# EAGLE board SMD_optek_led-mosfet (EAGLE 6.2)
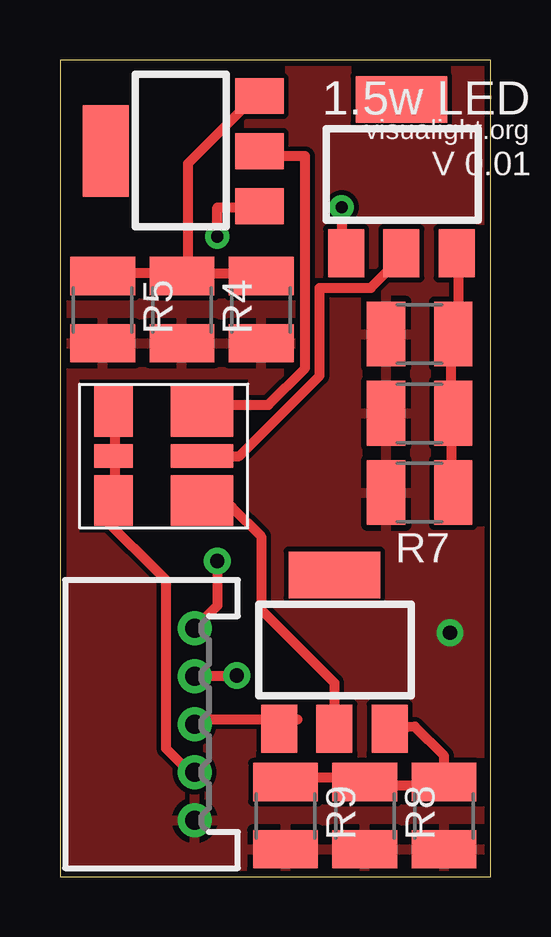
[diagram p0: board, top side]
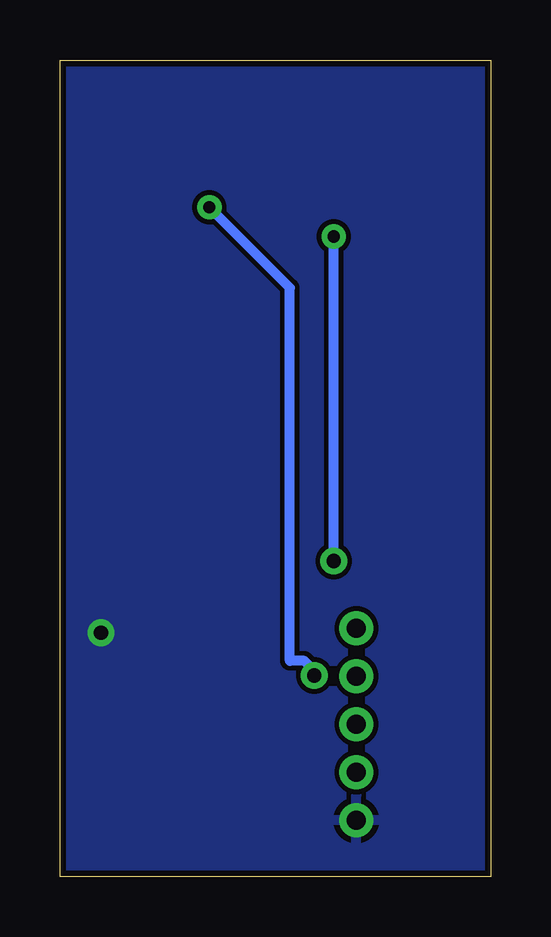
[diagram p1: board, bottom side, seen from below]

Size 17.96 x 34.03 mm. Coordinates in mm from the lower left corner, seen from the top.
Outline: 0,0 17.96,0 17.96,34.03 0,34.03 0,0
Copper layers (1*16): Top 0.035mm / dielectric 1.5mm / Bottom 0.035mm
Design rules: minimum track width 16mil, minimum drill 20mil, track to track 8mil, track to pad 8mil, pad to pad 8mil, via to via 8mil, smd to smd 8mil, copper to edge 10mil, drill to drill 8mil, minimum pad ring 12mil, minimum via ring 10mil, stop-mask expansion 4mil, vias tented up to drill 25mil, thermal gap 10mil

## Footprints (pad centres in the part's own frame; a part is rotated, then mirrored left to right if it is on the bottom)
DF3R-05 = drill 0.8: 1 -4,1.8; 2 -2,1.8; 3 0,1.8; 4 2,1.8; 5 4,1.8
SOT-223 = smd 1.499 x 2.007: 1 -2.3,-3.235; 2 0,-3.235; 3 2.3,-3.235 | smd 3.81 x 1.93: 4 0,3.175
R1210 = smd 1.6 x 2.7: 1 -1.4,0; 2 1.4,0
OVSPRGBCR4 = smd 2.108 x 1.6: 1 1.854,2.095; 3 -1.854,2.095 | smd 0.991 x 1.6: 2 0,2.095 | smd 2.108 x 2.591: 4 -1.854,-1.6; 6 1.854,-1.6 | smd 0.991 x 2.591: 5 0,-1.6

## Placement (x,y rotation side)
PL1  [DF3R-05]  3.81,6.35 270 top
Q1  IRLL024  [SOT-223]  5.08,30.23 90 top
Q2  IRLL024  [SOT-223]  11.43,9.4 0 top
Q3  IRLL024  [SOT-223]  14.22,29.21 0 top
R1  13.7  [R1210]  8.38,23.62 270 top
R2  20ohm  [R1210]  14.99,19.3 180 top
R3  13.7  [R1210]  16,2.54 270 top
R4  13.7  [R1210]  5.08,23.62 270 top
R5  13.7  [R1210]  1.78,23.62 270 top
R6  20ohm  [R1210]  14.99,22.61 180 top
R7  20ohm  [R1210]  14.99,16 180 top
R8  13.7  [R1210]  12.7,2.54 270 top
R9  13.7  [R1210]  9.4,2.54 270 top
U$1  [OVSPRGBCR4]  4.32,17.53 90 top

## Library data of the parts
PL1 = con-hirose-df3
Q1-Q3 = transistors
R1-R9 = adafruit
U$1 = led

## Nets
BLUE: PL1.3 Q2.1
GND: PL1.5 R1.2 R2.2 R3.2 R4.2 R5.2 R6.2 R7.2 R8.2 R9.2
GREEN: PL1.1 Q1.1
N$1: Q1.2 U$1.6
N$2: Q3.2 U$1.5
N$3: Q2.2 U$1.4
N$4: Q1.3 R1.1 R4.1 R5.1
N$5: Q3.3 R2.1 R6.1 R7.1
N$6: Q2.3 R3.1 R8.1 R9.1
RED: PL1.2 Q3.1
VCC: PL1.4 U$1.1 U$1.2 U$1.3

## Tracks (layer width: path | path; a pad name or v marks a point on that pad's centre or on a via)
BLUE
  Top 0.406: Q2.1 9.91,6.55 5.64,6.55 PL1.3
GND  (via drill 0.6)
  other vias: 16.26,10.16
  pour Bottom: 0,34.04 20.57,34.04 20.57,0 0,0
  pour Top: 0,34.04 20.57,34.04 20.57,0 0,0
GREEN  (via drill 0.51, 0.6)
  Top 0.406: v6.55,13.16 6.55,11.29 PL1.1 | v6.55,26.67 6.55,27.89 8.08,27.89 Q1.1
  Bottom 0.406: v6.55,13.16 v6.55,26.67
N$1
  Top 0.406: Q1.2 8.38,30.02 10.21,30.02 10.21,21.18 8.69,19.66 5.94,19.66 U$1.6
N$2
  Top 0.406: U$1.5 7.47,17.53 10.82,20.88 10.82,24.54 12.95,24.54 14.17,25.76 Q3.2
N$3
  Top 0.406: Q2.2 11.43,8.08 8.38,11.12 8.38,14.17 7.16,15.39 5.94,15.39 U$1.4
N$4
  Top 0.406: 5.33,25.15 5.33,29.72 8.08,32.46 Q1.3 | R5.1 1.98,25.15 5.03,25.15 R4.1 5.33,25.15 | 5.33,25.15 8.38,25.15 R1.1
N$5
  Top 0.406: Q3.3 16.61,25.76 16.61,22.71 R6.1 16.31,22.4 16.31,19.36 R2.1 16.31,19.05 16.31,16 R7.1
N$6
  Top 0.406: Q2.3 14.78,6.25 16,5.03 R3.1 16,3.81 12.95,3.81 R8.1 12.65,4.11 9.6,4.11 R9.1
RED  (via drill 0.51, 0.6)
  Top 0.406: 11.43,25.45 11.73,25.76 Q3.1 11.73,26.06 v11.73,27.89 | v7.37,8.38 7.33,8.35 PL1.2
  Bottom 0.406: v11.73,27.89 8.38,24.54 8.38,8.99 7.77,8.99 7.16,8.38 v7.37,8.38
VCC
  Top 0.406: PL1.4 5.33,4.42 4.42,5.33 4.42,12.34 1.68,15.09 1.98,15.39 U$1.3 2.29,15.7 2.29,17.53 | 2.29,17.53 2.29,19.36 U$1.1 | 2.29,17.53 U$1.2

## Text on the board
tNames: 1.5w LED | visualight.org | V 0.01